# Altium PCB PCB.PcbDoc
Units mil, origin at the board's own origin, x right, y up, seen from the top; angles counter-clockwise.
Board outline 2190 x 1525 mil, 2 copper layers (Top Layer, Bottom Layer); 21 components, 16 nets, 92 pads, 17 vias.
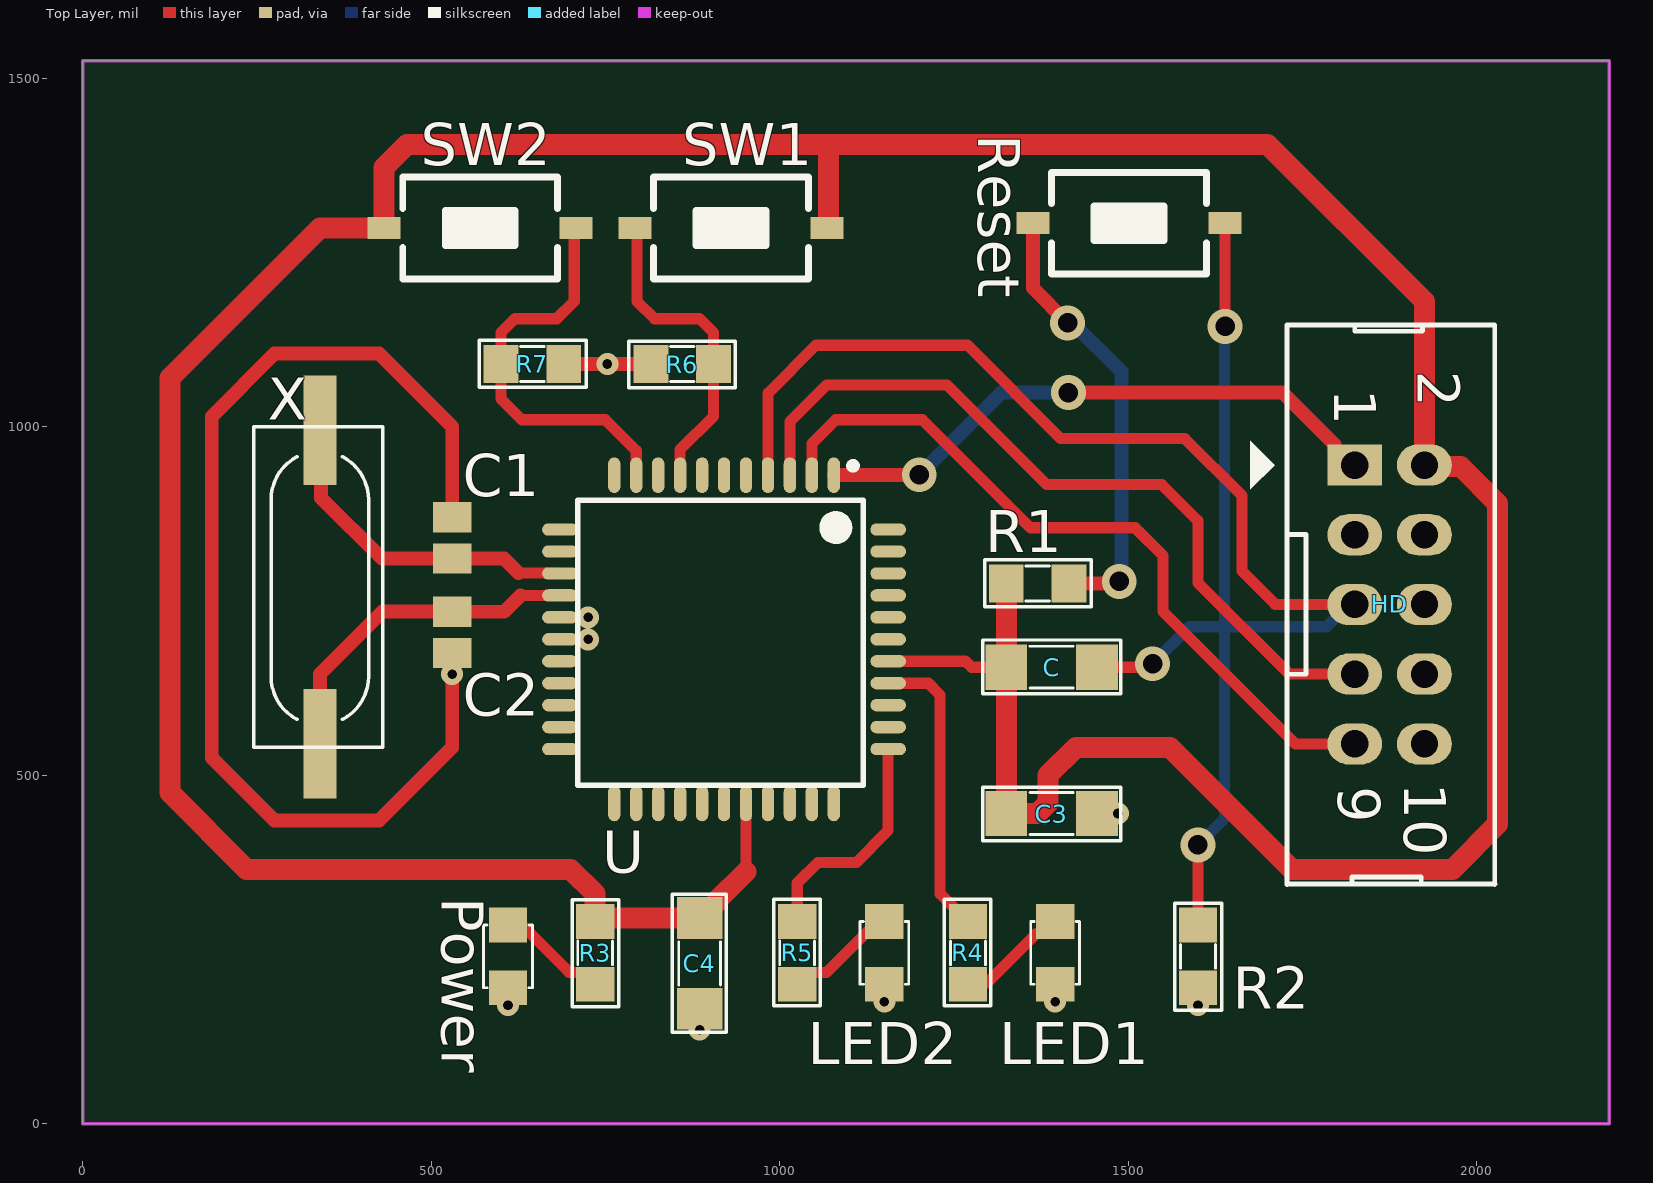
[diagram p0: Top Layer view]
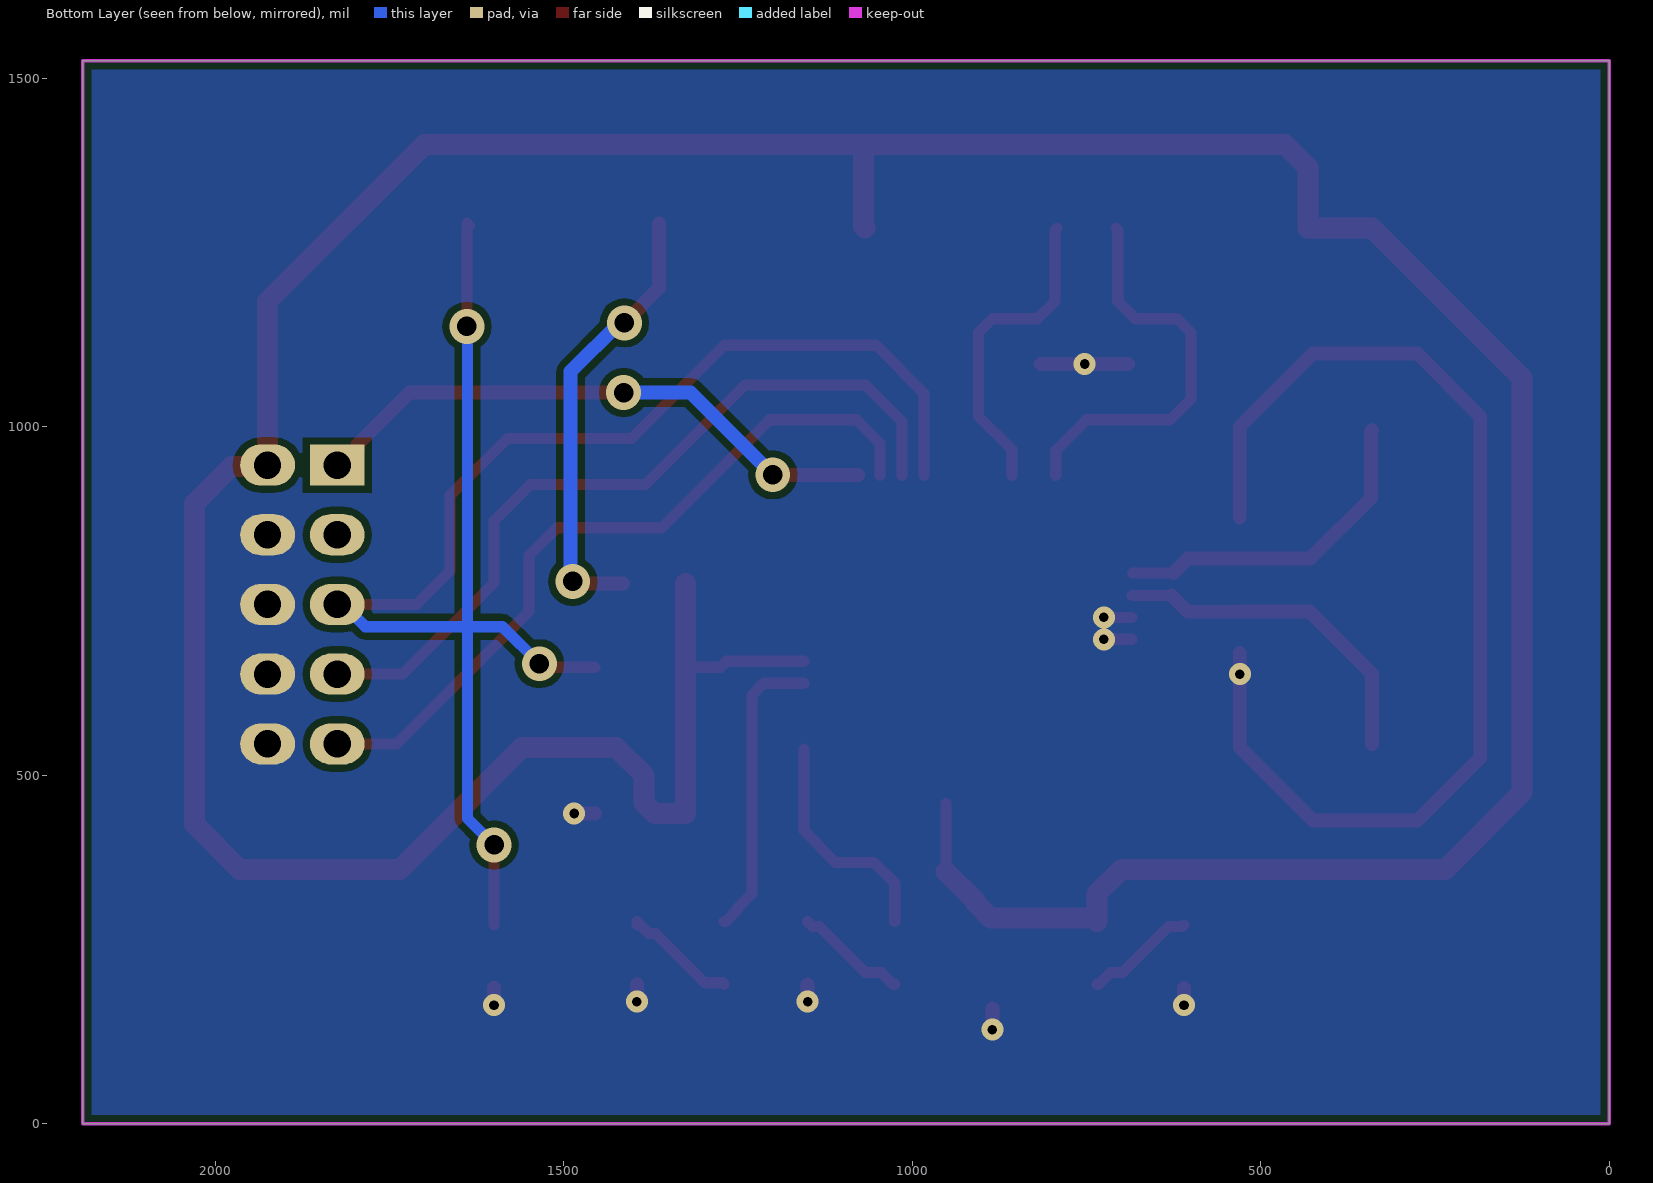
[diagram p1: Bottom Layer view, seen from below]
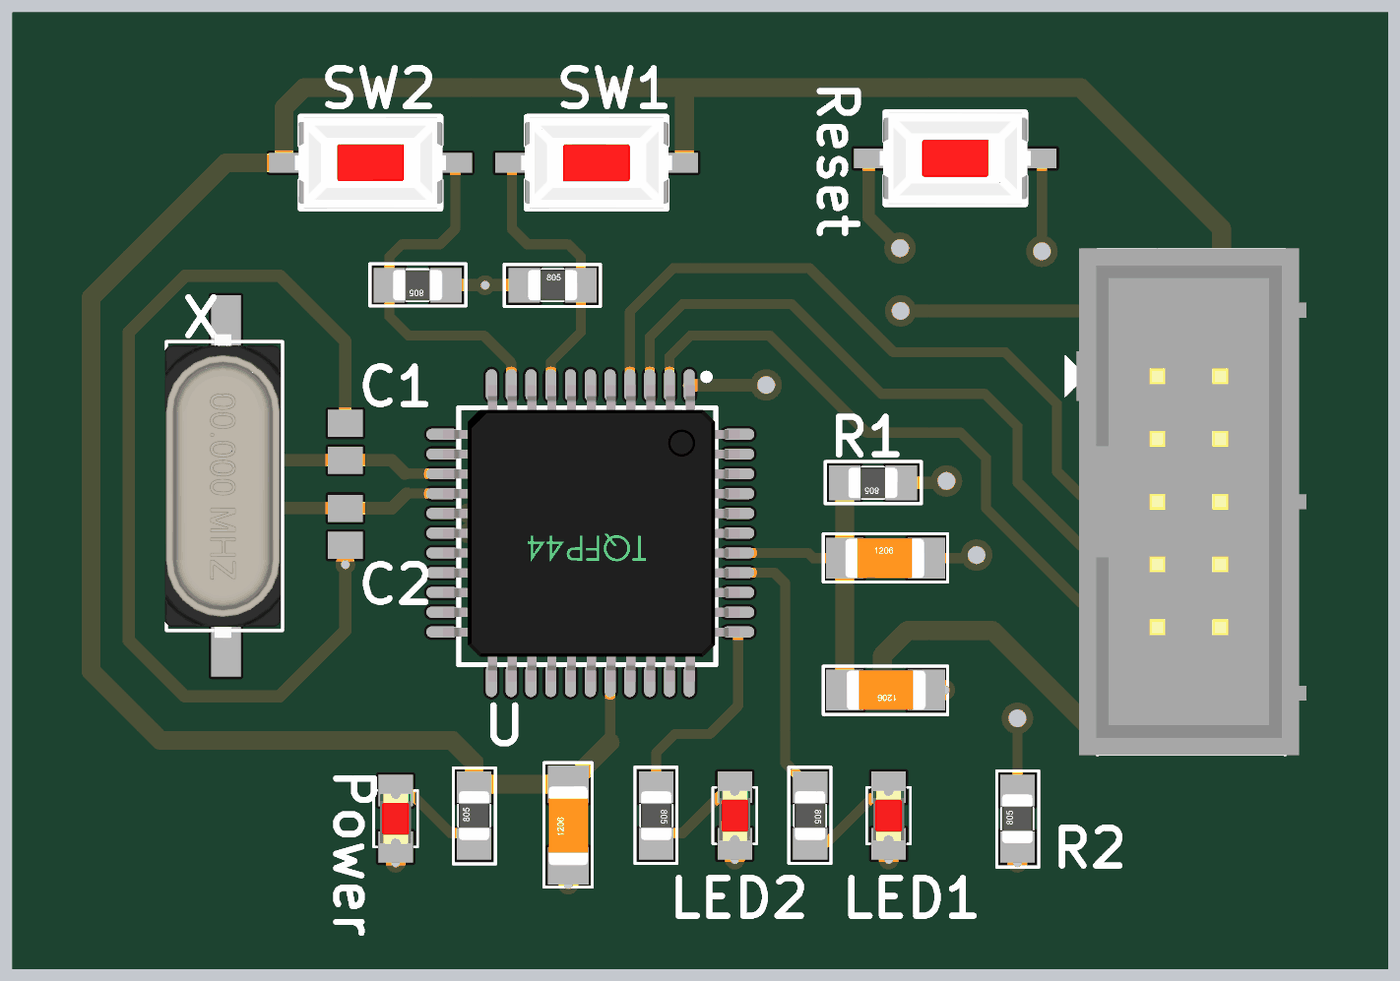
[diagram p2: 3D render of the assembled board from above, using the file's embedded part models]

## Layer stack, top to bottom
Top Solder: solder mask 0.4, Solder Resist, Dk 3.5
Top Layer: signal copper 1.4
Dielectric 1: dielectric 12.6, FR-4, Dk 4.8
Bottom Layer: signal copper 1.4
Bottom Solder: solder mask 0.4, Solder Resist, Dk 3.5

## Board outline
0,0 2190,0 2190,1525 0,1525

## Design rules (kind name [scope] priority, off if disabled: settings)
Clearance Clearance_1 [InNamedPolygon('Bottom Layer-No Net')] p1: gap=10 ignorepadtopadclearanceinfootprint=TRUE
Clearance [All] p2: gap=10 ignorepadtopadclearanceinfootprint=TRUE
PolygonConnect PolygonConnect_2 [All vs IsNamedPolygon('Bottom Layer-No Net')] p1: connectstyle=Direct reliefconductorwidth=10 reliefentries=4 polygonreliefangle="90 Angle" airgapwidth=10
PolygonConnect PolygonConnect_1 [All vs IsNamedPolygon('Bottom Layer-No Net')] p2: connectstyle=Relief reliefconductorwidth=78.74 reliefentries=4 polygonreliefangle="90 Angle" airgapwidth=39.37
PolygonConnect [All] p3: connectstyle=Relief reliefconductorwidth=10 reliefentries=4 polygonreliefangle="90 Angle" airgapwidth=10
RoutingVias [All] p1: holewidth=28 width=50 viastyle="Through Hole" minholewidth=28 minwidth=50 maxholewidth=28 maxwidth=50
SolderMaskExpansion [All] p1: expansion=4
Width [All] p1: maxlimit=50 minlimit=10 preferedwidth=20 minimp=50.000000 maximp=50.000000 favimp=50.000000
30 further rules are at their usual default settings.

## Components (designator, comment, footprint, x,y, rotation, side; value= is the part's Value field where it differs from the comment)
C "100uF" SM-Cap-1206 1325,655 r0 top value=0,1uF/300V
C1 "33pF" C0805 530,840.47 r270 top value=33p
C2 "33pF" C0805 530,705 r90 top value=33p
C3 "100nF" SM-Cap-1206 1455,445 r180 top value=0,1uF/300V
C4 "100nF" SM-Cap-1206 885,165 r90 top value=0,1uF/300V
HD "Header 5x2" Hed2X5 1825,945 r270 top
LED1 "LED1" LED-0805-Red 1395,290 r270 top value="LED 3 - 5 ly 2 Colour"
LED2 "LED" LED-0805-Red 1150,290 r270 top value="LED 3 - 5 ly 2 Colour"
Power "LED" LED-0805-Red 610,285 r270 top value="LED 3 - 5 ly 2 Colour" (schematic designator LED)
R1 "100" SM-RES-0805 1415,775 r180 top value="R1/4W - 1K"
R2 "8.2k" SM-RES-0805 1600,195 r90 top value="R1/4W - 1K"
R3 "220" SM-RES-0805 735,200 r90 top value="R1/4W - 1K"
R4 "220" SM-RES-0805 1270,290 r270 top value="R1/4W - 1K"
R5 "220" SM-RES-0805 1025,290 r270 top value="R1/4W - 1K"
R6 "10k" SM-RES-0805 815,1090 r0 top value="R1/4W - 1K"
R7 "10k" SM-RES-0805 690,1090 r180 top value="R1/4W - 1K"
Reset "" SW1-SMD 1501,1292 r0 top value="SW chip 2 pin" (schematic designator SW)
SW1 "" SW1-SMD 930,1285 r180 top value="SW chip 2 pin"
SW2 "" SW1-SMD 570,1285 r0 top value="SW chip 2 pin"
U "AT89S52-24AU" TQFP44 920,695 r270 top
X "12Mhz" XTAL-RU49/4 340,575 r90 top value=4Mhz

## Footprints (in the part's own frame and the unit in brackets; to place one, negate y for a bottom-side part, rotate by r counter-clockwise, add the part's x,y. Pads: shape width x height; smd on the part's side, far side on the other; paste and mask are expansions set on the pad)
C0805 [mm] "Chip Capacitor, Body 2.0x1.3mm, IPC High Density"
  rect 1.1x1.4 smd: 1(-0.75,0) 2(0.75,0)
  body extent -1.1,-0.72 1.1,0.72, height 1.4
Hed2X5 [mm] "Header 10x2,20 pin, connecter"
  rect 1.5x2 hole 1: 1(0,0)
  oval 1.5x2 hole 1: 2(0,2.54) 3(2.54,0) 4(2.54,2.54) 5(5.08,0) 6(5.08,2.54) 7(7.62,0) 8(7.62,2.54) 9(10.16,0) 10(10.16,2.54)
  silkscreen extent -5.1,-3.81 15.29,5.11, body extent -5.17,-3.33 15.33,5.97, height 8.82
LED-0805-Red [mil]
  rect 50x55 smd: 1(0,0) 2(90,0)
  silkscreen extent 0,-35 90,35, body extent 5,-25 85,25, height 43
SM-Cap-1206 [mil]
  rect 60x65 smd: 1(0,0) 2(130,0)
  silkscreen extent -34,-38 164,39, body extent 1,-31 127,32, height 40
SM-RES-0805 [mil]
  rect 50x55 smd: 1(0,0) 2(90,0)
  silkscreen extent -32,-34 121,33, body extent 6,-25 84,25, height 31
SW1-SMD [mm]
  rect 1.2x0.8 smd: 1(-3.5,0) 2(3.5,0)
  silkscreen extent -2.82,-1.85 2.82,1.85, body extent -3.05,-1.85 3.05,1.85, height 2.5
TQFP44 [mm] "TQFP, 44-Leads, Body 10X10mm, Pitch 0.80mm, IPC High Density"
  oval 1.3x0.45 smd: 1(-5.981,4) 2(-5.981,3.2) 3(-5.981,2.4) 4(-5.981,1.6) 5(-5.981,0.8) 6(-5.981,0) 7(-5.981,-0.8) 8(-5.981,-1.6) 9(-5.981,-2.4) 10(-5.981,-3.2) 11(-5.981,-4) 23(5.981,-4) 24(5.981,-3.2) 25(5.981,-2.4) 26(5.981,-1.6) 27(5.981,-0.8) 28(5.981,0) 29(5.981,0.8) 30(5.981,1.6) 31(5.981,2.4) 32(5.981,3.2) 33(5.981,4)
  oval 0.45x1.3 smd: 12(-4,-5.981) 13(-3.2,-5.981) 14(-2.4,-5.981) 15(-1.6,-5.981) 16(-0.8,-5.981) 17(0,-5.981) 18(0.8,-5.981) 19(1.6,-5.981) 20(2.4,-5.981) 21(3.2,-5.981) 22(4,-5.981) 34(4,5.981) 35(3.2,5.981) 36(2.4,5.981) 37(1.6,5.981) 38(0.8,5.981) 39(0,5.981) 40(-0.8,5.981) 41(-1.6,5.981) 42(-2.4,5.981) 43(-3.2,5.981) 44(-4,5.981)
  silkscreen extent -6.45,-5.33 5.33,5.07, body extent -5.99,-5.96 6.01,6.04, height 1.05
XTAL-RU49/4 [mm]
  rect 4x1.2 smd: 1(-0.762,0) 2(10.668,0)
  silkscreen extent -0.89,-2.29 10.8,2.41, body extent -1.2,-2.22 11.1,2.48, height 4.3

## Part data
C C3 C4: library part CN, Designed by=VanDungEvn
C1 C2: library part CapSMD, "Capacitor", LatestRevisionDate=17-Jul-2002, LatestRevisionNote="Re-released for DXP Platform.", PackageReference=RAD-0.3, Published=8-Jun-2000, Publisher="Altium Limited"
HD: library part HED5x2
LED1 LED2 Power: library part "LED SMD"
R1 R2 R3 R4 R5 R6 R7: library part R1/4W, "Resistor 1/4W"
Reset SW1 SW2: library part SW2, "Switch button 2 pin"
U: "Atmel 8 Bit Micro 4.0-5.5V 24MHz -40 to +80 Deg C 44TQFP (44A) Package GREEN OPTION", Package="44A 44-lead, Thin Plastic Gull Wing Quad Flatpack (TQFP)", GREEN OPTION=YES, PartNr=AT89S52-24AU, Vendor=ATMEL
X: library part XT2, "Crystal, 32.768 KHz, -40 to 85 degC, 3.2 x 1.5 x 0.9 mm SMD"

## Via types
v1: diameter 31.5, hole 13.78, Top Layer to Bottom Layer, tented both sides, 10 vias
v2: diameter 50, hole 28, Top Layer to Bottom Layer, tented both sides, 7 vias

## Nets (pads, with @x,y where several pads share a name; then routed paths per layer and width w, separated by ;. In a path a pad name is that pad's centre, name@x,y a point inside that pad or via, vN(x,y) a via of type N, cw(c..) or ccw(c..) an arc to the next point about the centre after c; other vN are vias at no path point)
GND: C1.1 C2.1 C3.1 C4.1 HD.4 HD.6 HD.8 HD.10 LED1.2 LED2.2 Power.2 R2.1 R6.1 R7.1 U.16 U.17 | length 1973
  Top Layer w16: U.17 v1(725,695) ; U.16 v1(725,726.5)
  Top Layer w20: C2.1 v1(530,645) 530,540 425,435 275,435 185,525 185,1015 275,1105 425,1105 530,1000 C1.1 ; v1(610,170) Power.2 ; R7.1 v1(752.5,1090) R6.1 ; v1(885,135) C4.1 ; v1(1150,175) LED2.2 ; v1(1395,175) LED1.2 ; C3.1 v1(1485,445) ; v1(1600,170) R2.1
INT0: R6.2 SW1.2 U.8 | length 459.2
  Top Layer w16: SW1.2 795,1282.2 795,1180 820,1155 885,1155 905,1135 R6.2 905,1015 857.01,967.01 U.8
MISO: HD.9 U.2 | length 1078.1
  Top Layer w16: U.2 1045.98,975.98 1080,1010 1205,1010 1360,855 1510,855 1550,815 1550,735 1740,545 HD.9
MOSI: HD.1 U.1 | length 845.5
  Top Layer w20: U.1 1199.47,930.47 v2(1200,931) ; v2(1414,1049) 1721,1049 1795.63,974.37 1795.63,964.53 1815.16,945 HD.1
  Bottom Layer w20: v2(1200,931) 1318,1049 v2(1414,1049)
NetC1_2: C1.2 U.14 X.2 | length 484.6
  Top Layer w16: 625,790 U.14@684.02,790
  Top Layer w20: X.2 342.02,992.98 342.02,897.98 429.06,810.94 C1.2 604.06,810.94 625,790
NetC2_2: C2.2 U.15 X.1 | length 491.7
  Top Layer w16: 627.99,757.99 U.15
  Top Layer w20: X.1 340,645 430,735 529.53,735 C2.2 604.53,734.53 627.99,757.99
NetLED1_1: LED1.1 R4.2 | length 164.8
  Top Layer w16: R4.2 1272.13,202.13 1297.13,202.13 1368,273 1378,273 LED1.1 ; LED1.1@1392.5,285 LED1.1@1395,285
NetLED2_1: LED2.1 R5.2 | length 162.3
  Top Layer w16: R5.2 1027.5,200 1044.5,217 1067,217 1132.87,282.87 1142.87,282.87 LED2.1
NetLED_1: Power.1 R3.1 | length 160.2
  Top Layer w16: Power.1 612.13,282.87 632.13,282.87 698,217 715.5,217 732.5,200 R3.1
NetR1_1: R1.1 Reset.1 | length 640.9
  Top Layer w20: Reset.1 1363.2,1198.8 v2(1413,1149) ; R1.1 1484,775 v2(1487,778)
  Bottom Layer w20: v2@1416,1149 1420,1149 1490,1079 v2@1490,778
NetR4_1: R4.1 U.37 | length 424.6
  Top Layer w16: U.37 1212.99,632.01 1230,615 1230,330 1250.5,309.5 1250.5,307 1267.5,290 R4.1
NetR5_1: R5.1 U.34 | length 333.8
  Top Layer w16: R5.1 1025,345 1055,375 1110,375 1155.47,420.47 U.34
RESET: C.2 HD.5 R2.2 Reset.2 U.4 | length 2645.7
  Top Layer w16: U.4 982.99,1047.99 1052,1117 1269,1117 1403,983 1581,983 1663,901 1663,793 1711,745 HD.5 ; C.2 1530,655 v2(1535,660) ; R2.2 v2(1600,400) ; Reset.2 1635,1288.2 1639,1284.2 v2(1639,1144)
  Bottom Layer w16: v2(1535,660) 1588,713 1638,713 ; v2(1600,400) 1638,438 1638,713 ; v2@1638,1151 1638,713 ; HD.5 1816.71,745 1784.71,713 1638,713
SCK: HD.7 U.3 | length 1133.3
  Top Layer w16: U.3 1014.49,1007.49 1067,1060 1240,1060 1383,917 1548,917 1600,865 1600,776 1731,645 HD.7
TIM0: R7.2 SW2.2 U.10 | length 585
  Top Layer w16: SW2.2 705,1282.2 705,1180 680,1155 620,1155 600,1135 R7.2 600,1040 630,1010 750,1010 794.02,965.98 U.10
VCC: C3.2 C4.2 C.1 HD.2 R1.2 R3.2 SW1.1 SW2.1 U.29 U.38 | length 6047.6
  Top Layer w16: 951.5,361.5 U.29 ; U.38 1266.5,663.5 1275,655 C.1
  Top Layer w30: 951.5,361.5 909.5,319.5 909.5,317 887.5,295 C4.2 740,295 R3.2 735,330 700,365 235,365 125,475 125,1070 340,1285 SW2.1 432.2,1372.2 465,1405 1070,1405 ; SW1.1 1070,1287.2 1070,1405 ; R1.2 C.1 C3.2 1370,445 1385,460 1385,500 1425,540 1560,540 1735,365 1965,365 2030,430 2030,890 1977.01,942.99 1927.01,942.99 HD.2 1925,1180 1700,1405 1070,1405
pads on no net: HD.3 U.5 U.6 U.7 U.9 U.11 U.12 U.13 U.18 U.19 U.20 U.21 U.22 U.23 U.24 U.25 U.26 U.27 U.28 U.30 U.31 U.32 U.33 U.35 U.36 U.39 U.40 U.41 U.42 U.43 U.44

## Polygon pours and split planes (outlines as drawn)
GND on Bottom Layer "Bottom Layer-No Net" (solid, remove dead copper, pour order 0): 0,0 2190,0 2190,1525 0,1525

## Keep-outs
Keep-Out Layer:
  the board outline again, w5

## Text inside footprints (layer, text, board x,y; h text height)
HD: Top Overlay "10" at 1896,489 h60 r270; Top Overlay "9" at 1801,484 h60 r270; Top Overlay "2" at 1915,1080 h60 r270; Top Overlay "1" at 1795.47,1054.25 h60 r270